# Altium PCB PCB_Pulse Rate Sensor.pcbdoc
Units mm, origin at the board's own origin, x right, y up, seen from the top; angles counter-clockwise.
Board outline 89.57 x 61.27 mm, 2 copper layers (Top Layer, Bottom Layer); 18 components, 14 nets, 56 pads, 0 vias.
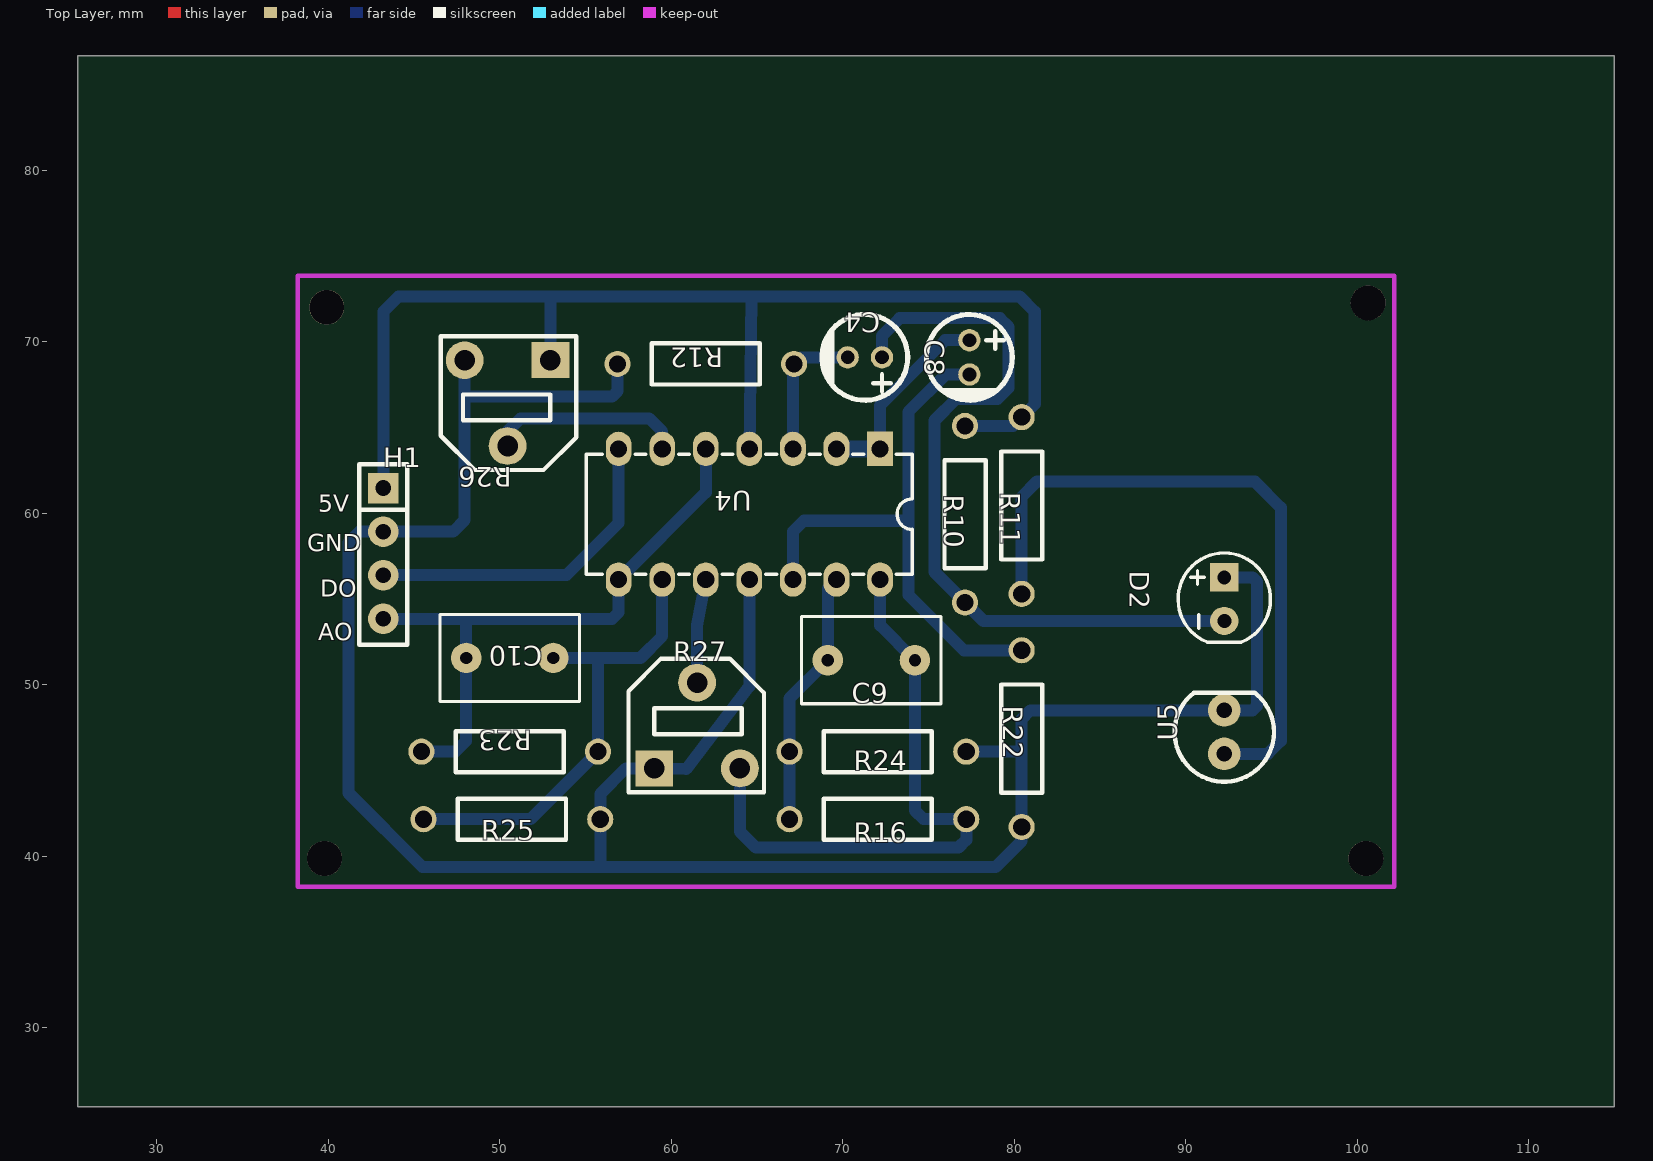
[diagram p0: Top Layer view]
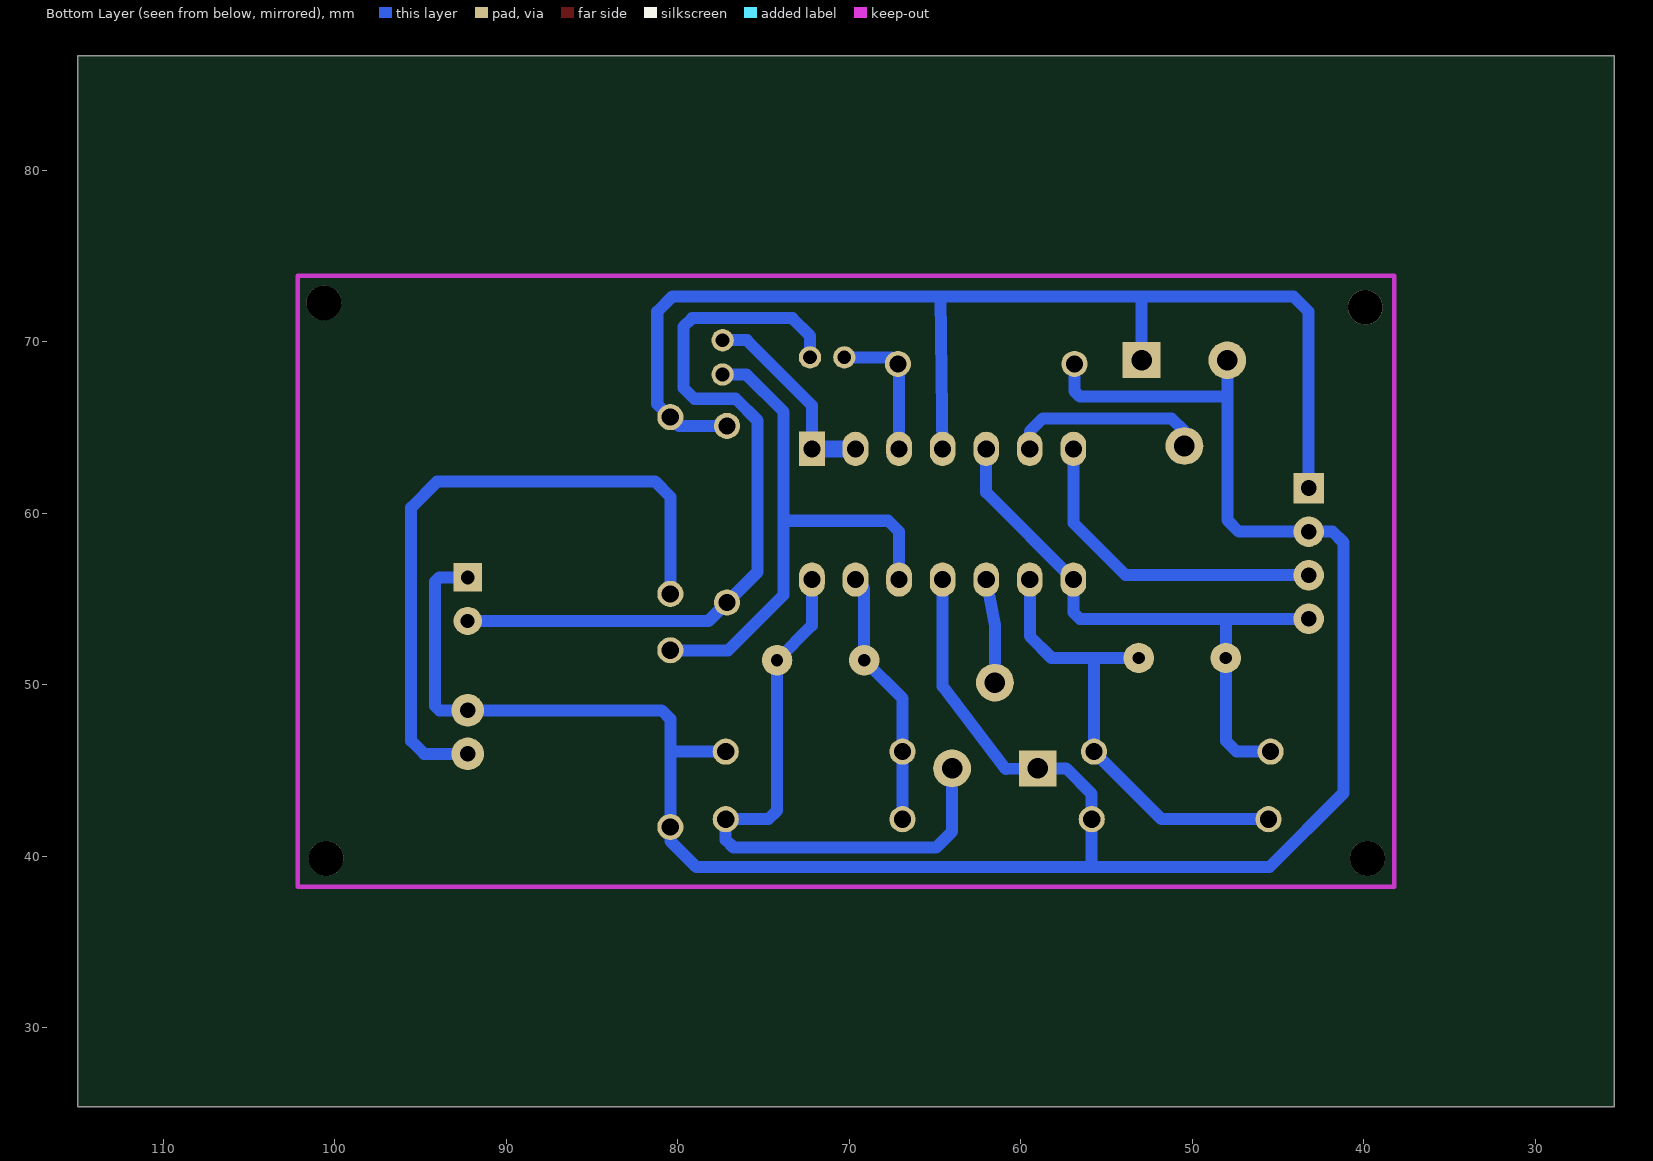
[diagram p1: Bottom Layer view, seen from below]

## Layer stack, top to bottom
Top Layer: signal copper (thickness not stored)
Dielectric: dielectric 0.32, FR-4, Dk 4.8
Bottom Layer: signal copper (thickness not stored)

## Board outline
114.971,25.4 25.4,25.4 25.4,86.67 114.971,86.67

## Components (designator, comment, footprint, x,y, rotation, side; value= is the part's Value field where it differs from the comment)
C4 "4.7uF" CAP-TH_BD5.0-P2.00-D0.8-FD 71.283,69.088 r180 top
C8 "4.7uF" CAP-TH_BD5.0-P2.00-D0.8-FD 77.379,69.088 r270 top
C9 "100nF" RAD-0.2 71.664,51.435 r0 top
C10 "100nF" RAD-0.2 50.582,51.562 r180 top
D2 "PHOTODIODE" "LED 5MM TH" 92.238,54.991 r270 top
H1 "HEADER 4P 2.54MM" "HEADER 4P 2.54MM" 43.216,56.388 r0 top
R10 "10K" RES-TH_BD2.4-L6.3-P10.30-D0.6 77.125,59.944 r270 top
R11 "220" RES-TH_BD2.4-L6.3-P10.30-D0.6 80.427,60.452 r270 top
R12 "47K" RES-TH_BD2.4-L6.3-P10.30-D0.6 62.012,68.707 r180 top
R16 "680K" RES-TH_BD2.4-L6.3-P10.30-D0.6 72.045,42.164 r0 top
R22 "47K" RES-TH_BD2.4-L6.3-P10.30-D0.6 80.427,46.863 r270 top
R23 "680K" RES-TH_BD2.4-L6.3-P10.30-D0.6 50.582,46.101 r180 top
R24 "6.8K" RES-TH_BD2.4-L6.3-P10.30-D0.6 72.045,46.101 r0 top
R25 "6.8K" RES-TH_BD2.4-L6.3-P10.30-D0.6 50.709,42.164 r0 top
R26 "1K" RES-ADJ-SMD_RM065-V1 50.455,66.421 r180 top
R27 "1K" RES-ADJ-SMD_RM065-V1 61.504,47.625 r0 top
U4 "LM324N" DIP-14_L19.0-W7.0-P2.54-LS7.6-BL 64.552,59.944 r180 top
U5 "5mm LED copy" "5MM LED" 92.238,45.974 r90 top

## Footprints (in the part's own frame and the unit in brackets; to place one, negate y for a bottom-side part, rotate by r counter-clockwise, add the part's x,y. Pads: shape width x height; smd on the part's side, far side on the other; paste and mask are expansions set on the pad)
"5MM LED" [mm]
  round 1.9 hole 0.914: 1(0,0) 2(2.54,0)
  silkscreen extent -1.62,-2.9 3.56,2.9
CAP-TH_BD5.0-P2.00-D0.8-FD [mm]
  round 1.3 hole 0.8: 1(-1,0) 2(1,0)
  silkscreen extent -2.5,-2.5 2.5,2.5
DIP-14_L19.0-W7.0-P2.54-LS7.6-BL [mm]
  rect 1.5x2 hole 1: 1(-7.62,-3.81)
  oval 1.5x2 hole 1: 2(-5.08,-3.81) 3(-2.54,-3.81) 4(0,-3.81) 5(2.54,-3.81) 6(5.08,-3.81) 7(7.62,-3.81) 8(7.62,3.81) 9(5.08,3.81) 10(2.54,3.81) 11(0,3.81) 12(-2.54,3.81) 13(-5.08,3.81) 14(-7.62,3.81)
  silkscreen extent -9.5,-3.5 9.5,3.5
"HEADER 4P 2.54MM" [mil]
  rect 70x70 hole 36: 1(0,200)
  round 70 hole 36: 2(0,100) 3(0,0) 4(0,-100)
  silkscreen extent -55,-160 55,255
"LED 5MM TH" [mm]
  rect 1.65x1.65 hole 0.813: 1(-1.27,0)
  round 1.65 hole 0.813: 2(1.27,0)
  silkscreen extent -2.69,-2.69 2.5,2.69
RAD-0.2 [mil]
  round 70 hole 28: 1(100,0) 2(-100,0)
  silkscreen extent -160,-100 160,100
RES-ADJ-SMD_RM065-V1 [mm]
  rect 2.2x2.1 hole 1.199: 1(-2.499,-2.5)
  round 2.2 hole 1.199: 2(0,2.5) 3(2.499,-2.499)
  silkscreen extent -4,-3.9 3.9,3.9
RES-TH_BD2.4-L6.3-P10.30-D0.6 [mm]
  round 1.524 hole 1: 1(-5.15,0) 2(5.15,0)
  silkscreen extent -3.15,-1.2 3.15,1.2

## Free pads (board coordinates)
  round 2.032 hole 2.032 unplated: ""(39.787,39.878) ""(39.914,72.009) ""(100.493,39.878) ""(100.62,72.263)

## Nets (pads, with @x,y where several pads share a name; then routed paths per layer and width w, separated by ;. In a path a pad name is that pad's centre, name@x,y a point inside that pad or via, vN(x,y) a via of type N, cw(c..) or ccw(c..) an arc to the next point about the centre after c; other vN are vias at no path point)
+5V: H1.1 R10.1 R11.1 R26.1 U4.4 | length 75.3
  Bottom Layer w0.7: H1.1 43.216,71.755 44.105,72.644 52.954,72.644 R26.1 52.954,72.476 52.957,72.644 ; 52.995,72.644 80.3,72.644 81.189,71.755 81.189,66.364 R11.1 ; U4.4@64.552,63.627 64.679,72.588 ; R10.1 79.919,65.095 R11.1
AO: C10.1 H1.4 R23.2 U4.5 U4.8 | length 37.8
  Bottom Layer w0.7: H1.4 48.042,53.848 ; R23.2 47.407,46.101 48.042,46.736 C10.1 ; U4.5 62.012,61.214 U4.8 56.932,54.229 56.551,53.848 48.042,53.848 ; C10.1 48.042,53.848 ; C10.1 48.042,53.848
C8_1: C8.1 U4.1 U4.2 | length 11.9
  Bottom Layer w0.7: U4.1 72.172,66.294 75.966,70.088 C8.1
  Bottom Layer w1: U4.2 U4.1
D2_2: C4.1 D2.2 R10.2 | length 44.8
  Bottom Layer w0.7: C4.1 72.283,70.342 73.315,71.374 79.157,71.374 79.665,70.866 79.665,67.31 79.03,66.675 76.617,66.675 75.347,65.405 75.347,56.572 R10.2 78.197,53.721 D2.2
DO: H1.3 U4.7 | length 19.3
  Bottom Layer w0.7: H1.3 53.884,56.388 56.932,59.436 U4.7
GND: D2.1 H1.2 R12.2 R22.2 R24.2 R25.2 R26.3 R27.1 U4.11 U5.2 | length 149.7
  Bottom Layer w0.7: R26.3 47.955,66.802 56.551,66.802 56.861,67.113 R12.2 ; R26.3 47.955,59.604 47.28,58.928 H1.2 41.819,58.928 41.184,58.293 41.184,43.688 45.502,39.37 59.741,39.37 ; U4.11 64.552,49.911 60.869,45.085 R27.1 57.353,45.126 55.86,43.632 R25.2 55.86,39.37 78.903,39.37 80.427,40.894 R22.2 80.427,48.006 80.935,48.514 U5.2 93.889,48.514 94.143,48.768 94.143,56.007 93.889,56.261 D2.1 ; R24.2 80.427,46.101 R22.2
R12_1: C4.2 R12.1 U4.3 | length 8.3
  Bottom Layer w0.7: U4.3 67.092,68.637 R12.1 67.543,69.088 C4.2
R22_1: C8.2 R22.1 U4.12 | length 43.7
  Bottom Layer w0.7: U4.12 67.092,58.928 67.727,59.563 73.823,59.563 73.823,65.913 ; R22.1 77.054,52.013 73.823,55.245 73.823,65.913 ; 73.823,65.913 75.998,68.088 ; 73.823,65.913 75.998,68.088 ; 75.998,68.088 C8.2 75.998,68.088
R24_1: C9.2 R16.1 R24.1 U4.13 | length 15.1
  Bottom Layer w0.7: R16.1 R24.1 66.894,49.206 C9.2 69.124,55.626 U4.13
R25_1: C10.2 R23.1 R25.1 U4.9 | length 30.1
  Bottom Layer w0.7: R25.1 51.795,42.164 R23.1 55.732,51.562 C10.2 58.202,51.562 59.472,52.832 U4.9
R26_2: R26.2 U4.6 | length 11.5
  Bottom Layer w0.7: R26.2 50.455,64.77 51.217,65.532 58.71,65.532 59.472,64.77 U4.6
R27_2: R27.2 U4.10 | length 6.1
  Bottom Layer w0.7: R27.2 61.504,53.467 U4.10
R27_3: C9.1 R16.2 R27.3 U4.14 | length 36.2
  Bottom Layer w0.7: R27.3 64.003,41.443 64.933,40.513 76.744,40.513 77.196,40.965 R16.2 74.712,42.164 74.204,42.672 C9.1 72.172,53.467 U4.14
U5_1: R11.2 U5.1 | length 39
  Bottom Layer w0.7: R11.2 80.427,60.96 81.316,61.849 94.016,61.849 95.54,60.325 95.54,46.736 94.778,45.974 U5.1

## Silkscreen, mask and mechanical layers (free items; w line width, h text height)
Top Overlay:
  text "5V" at 39.406,60.079 h1
  text "GND" at 38.771,57.793 h1
  text "DO" at 39.533,55.126 h1
  text "AO" at 39.406,52.586 h1